# Altium PCB Powerdist.PcbDoc
Units mm, origin at the board's own origin, x right, y up, seen from the top; angles counter-clockwise.
Board outline 152.4 x 101.6 mm, 2 copper layers (Top Layer, Bottom Layer); 37 components, 20 nets, 100 pads, 0 vias.
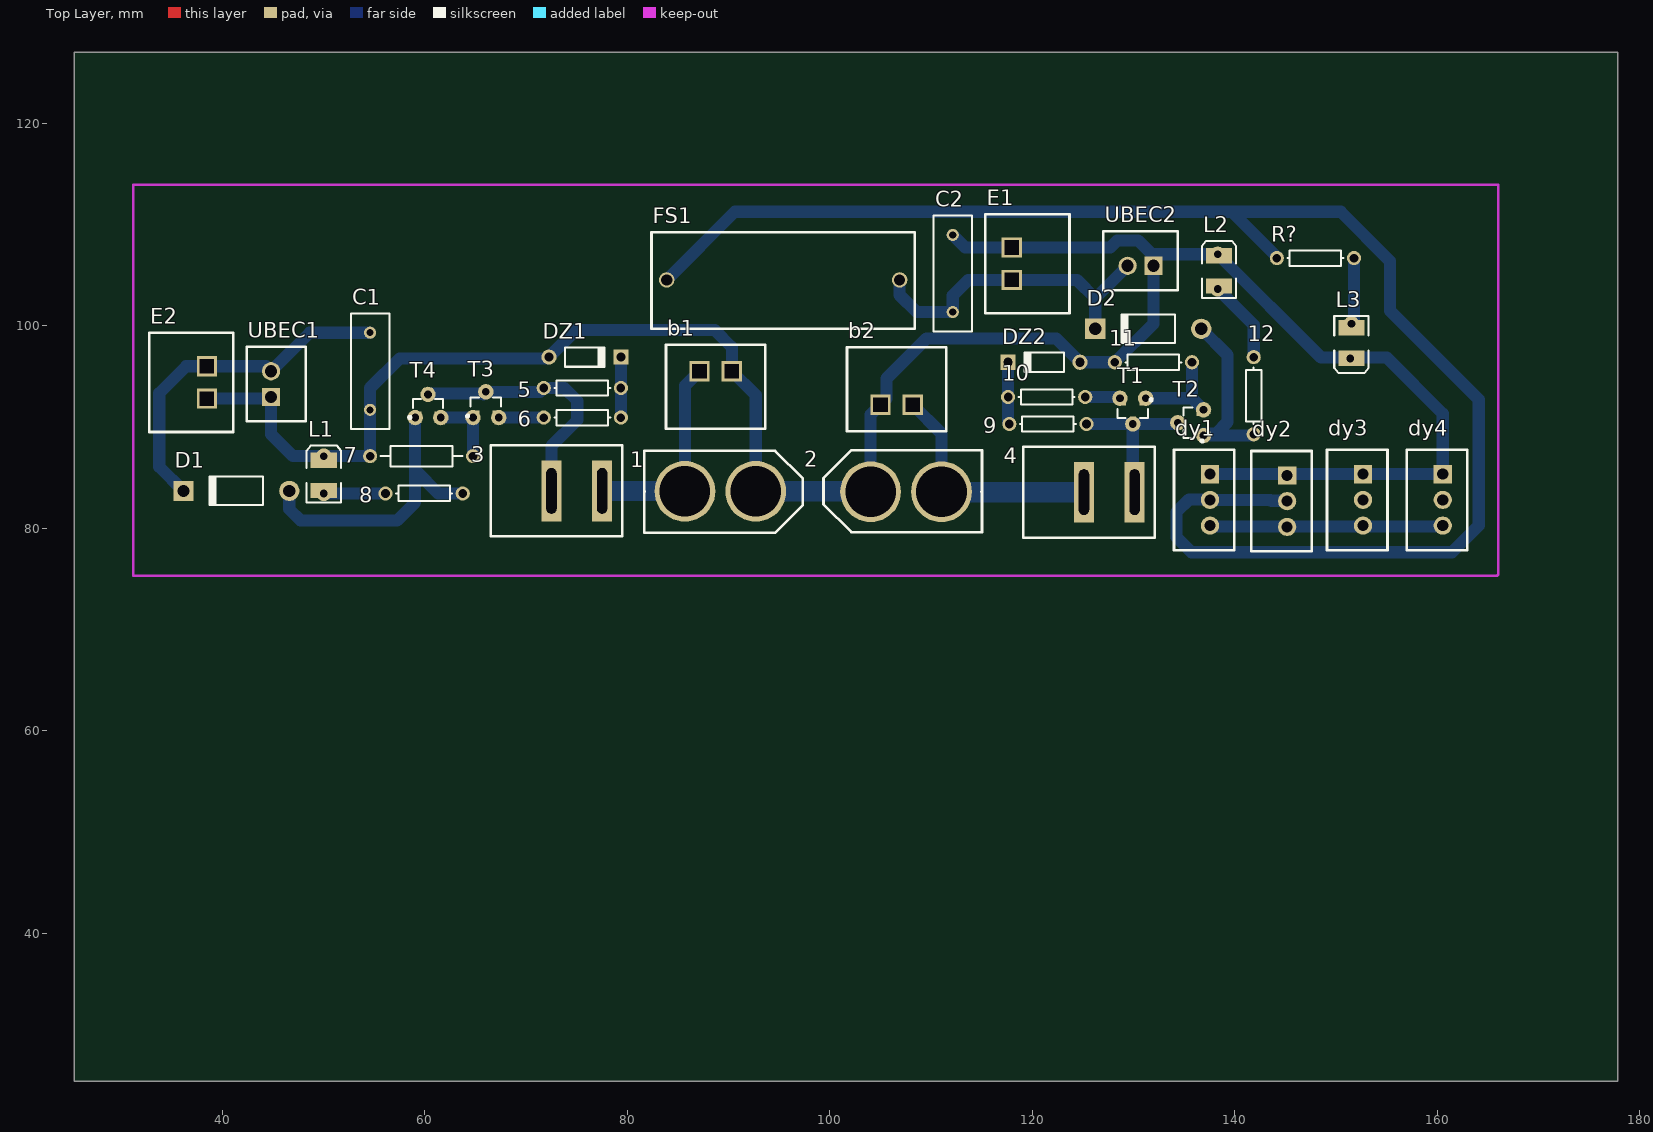
[diagram p0: Top Layer view]
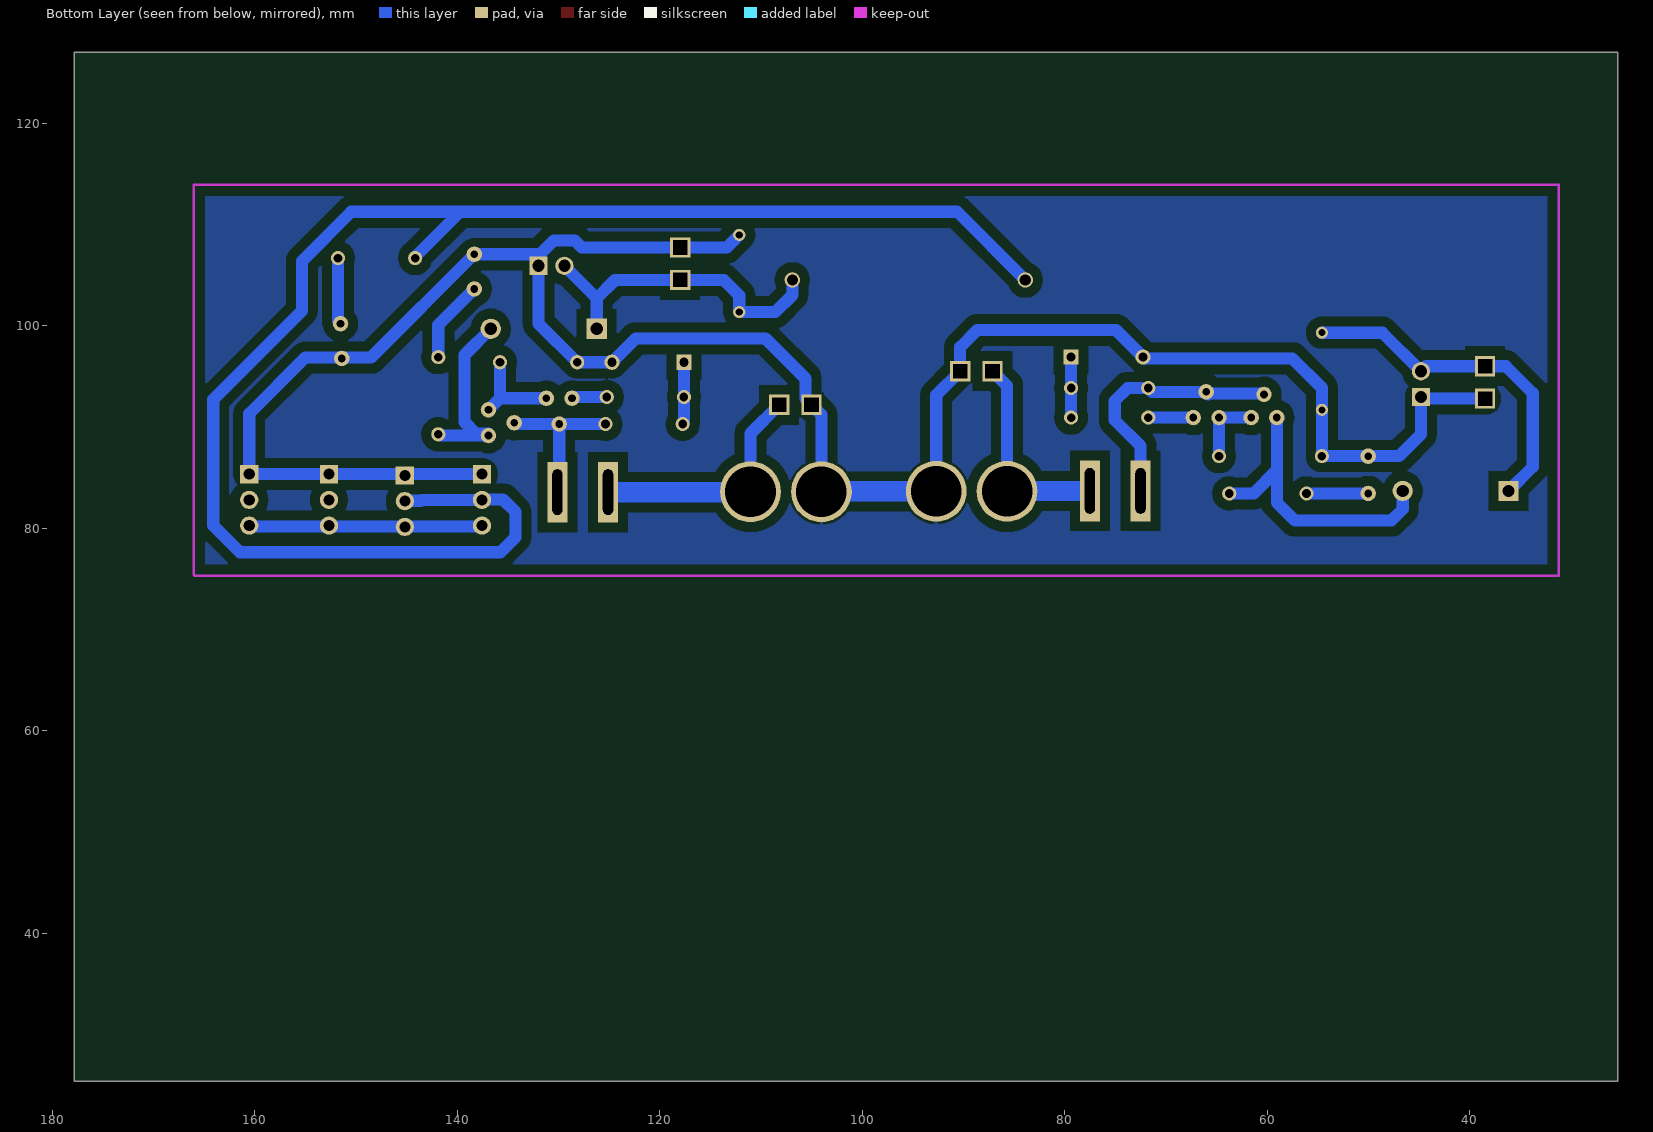
[diagram p1: Bottom Layer view, seen from below]

## Layer stack, top to bottom
Top Solder: solder mask 0.0102, Solder Resist, Dk 3.5
Top Layer: signal copper 0.0356
Dielectric 1: dielectric 0.32, FR-4, Dk 4.8
Bottom Layer: signal copper 0.0356
Bottom Solder: solder mask 0.0102, Solder Resist, Dk 3.5

## Board outline
25.4,25.4 177.8,25.4 177.8,127 25.4,127

## Design rules (kind name [scope] priority, off if disabled: settings)
Clearance [All] p1: gap=1
PolygonConnect [All] p1: connectstyle=Relief reliefconductorwidth=0.254 reliefentries=4 polygonreliefangle="90 Angle" airgapwidth=0.254
RoutingVias [All] p1: holewidth=0.711 width=1.27 viastyle="Through Hole" minholewidth=0.711 minwidth=1.27 maxholewidth=0.711 maxwidth=1.27
SolderMaskExpansion [All] p1: expansion=0.102
UnpouredPolygon [All] p1: allowunpoured=FALSE
Width [All] p1: maxlimit=1.2 minlimit=1.2 preferedwidth=1.2
29 further rules are at their usual default settings.

## Components (designator, comment, footprint, x,y, rotation, side; value= is the part's Value field where it differs from the comment)
1 "XT60" PCBComponent_1#1 83.693,80.645 r0 top
2 "XT60" PCBComponent_1#1 113.03,86.614 r180 top
3 "Swtch" PCBComponent_1#2 72.517,83.693 r0 top
4 "Swtch" PCBComponent_1#2 125.095,83.566 r0 top
5 "Res1" AXIAL-0.3 75.565,93.853 r0 top
6 "Res1" AXIAL-0.3 75.565,90.932 r180 top
7 "Res2" AXIAL-0.4 59.69,87.122 r180 top
8 "Res1" AXIAL-0.3 59.944,83.439 r180 top
9 "Res1" AXIAL-0.3 121.539,90.297 r180 top
10 "Res1" AXIAL-0.3 121.412,92.964 r0 top
11 "Res1" AXIAL-0.3 131.953,96.393 r180 top
12 "Res1" AXIAL-0.3 141.859,93.091 r90 top
b1 "buzzled1" PCBComponent_1#3 84.328,97.917 r0 top
b2 "buzzled2" PCBComponent_1#3 110.998,89.789 r180 top
C1 "Cap" RAD-0.3 54.61,95.504 r90 top
C2 "Cap" RAD-0.3 112.141,105.156 r270 top
D1 "Diode 1N4007" DO-41 41.402,83.693 r180 top
D2 "Diode 1N4007" DO-41 131.445,99.695 r180 top
dy1 "dynamixel" PCBComponent_1#4 137.541,85.344 r90 top
dy2 "dynamixel" PCBComponent_1#4 145.161,85.217 r90 top
dy3 "dynamixel" PCBComponent_1#4 152.654,85.344 r90 top
dy4 "dynamixel" PCBComponent_1#4 160.528,85.344 r90 top
DZ1 "Diode 1N4148" DO-35 75.819,96.901 r0 top
DZ2 "Diode 1N4148" DO-35 121.158,96.393 r180 top
E1 "EXP485" PCBComponent_1#3 115.57,101.727 r90 top
E2 "EXP485" PCBComponent_1#3 40.894,98.806 r270 top
FS1 "FUSE" PCBComponent_1#5 104.394,104.521 r180 top
L1 "LED3" 3.5X2.8X1.9 50.038,85.217 r90 top
L2 "LED3" 3.5X2.8X1.9 138.43,105.41 r90 top
L3 "LED3" 3.5X2.8X1.9 151.511,98.298 r270 top
R? "Res1" AXIAL-0.3 147.955,106.68 r180 top
T1 "BC557" SOT-23B_N 129.921,91.567 r270 top
T2 "BC557" SOT-23B_N 135.636,90.424 r180 top
T3 "BC557" SOT-23B_N 66.04,92.202 r90 top
T4 "BC557" SOT-23B_N 60.325,92.075 r90 top
UBEC1 "UBC1" PCBComponent_1#6 44.831,92.964 r270 top
UBEC2 "UBC2" PCBComponent_1#6 131.953,105.918 r0 top

## Footprints (in the part's own frame and the unit in brackets; to place one, negate y for a bottom-side part, rotate by r counter-clockwise, add the part's x,y. Pads: shape width x height; smd on the part's side, far side on the other; paste and mask are expansions set on the pad)
3.5X2.8X1.9 [mm] "SM LED; 2 C-Bend Leads; Body 3.5 x 2.8 x 1.9 mm, inc leads (LxWxH typ)"
  rect 1.5x2.6 smd: 1(-1.5,0) 2(1.5,0)
  silkscreen extent -2.65,-1.7 2.95,1.7
AXIAL-0.3 [mm] "Axial Device, Thru-Hole; 2 Leads; 0.3 in Pin Spacing"
  round 1.4 hole 0.85: 1(-3.81,0) 2(3.81,0)
  silkscreen extent -2.77,-0.76 2.77,0.76
AXIAL-0.4 [mm] "Axial Device, Thru-Hole; 2 Leads; 0.4 in Pin Spacing"
  round 1.4 hole 0.85: 1(-5.08,0) 2(5.08,0)
  silkscreen extent -4.06,-1.02 4.06,1.02
DO-35 [mm] "Diode, Axial; Body 3.8 x 1.9 mm (LxDia. max), Lead Dia. 0.53 mm (max)"
  round 1.5 hole 0.9: 1(-3.55,0)
  rect 1.5x1.5 hole 0.9: 2(3.55,0)
  silkscreen extent -1.95,-0.95 2.05,0.95
DO-41 [mm] "Diode, Axial; Body 5.2 x 2.7 mm (LxDia. max), Lead Dia. 0.86 mm (max)"
  round 2 hole 1.2: 1(-5.23,0)
  rect 2x2 hole 1.2: 2(5.23,0)
  silkscreen extent -2.65,-1.4 2.75,1.4
PCBComponent_1#1 [mm]
  round 6 hole 5: 1(2,3) 2(9,3)
  silkscreen extent -2,-1.1 13.65,7
PCBComponent_1#2 [mm]
  rect 2x6 hole 1 slot 4.5 at 90 deg: 1(0,0) 2(5,0)
  silkscreen extent -6,-4.5 7,4.5
PCBComponent_1#3 [mm]
  rect 2x2 hole 1.4 square: 1(2.8,-2.4) 2(6,-2.4)
  silkscreen extent -0.5,-8.1 9.3,0.2
PCBComponent_1#4 [mm]
  rect 1.8x1.8 hole 1.1: 1(0,0)
  round 1.8 hole 1.1: 2(-2.54,0) 3(-5.08,0)
  silkscreen extent -7.49,-2.41 2.41,3.56
PCBComponent_1#5 [mm]
  round 1.524 hole 1.1: 1(-2.5,0) 2(20.5,0)
  silkscreen extent -4,-4.7 22,4.8
PCBComponent_1#6 [mm]
  rect 1.8x1.8 hole 1.2: 1(0,0)
  round 1.8 hole 1.2: 2(-2.54,0)
  silkscreen extent -4.95,-2.41 2.41,3.43
RAD-0.3 [mm] "Radial Cap, Thru-Hole; 2 Leads; 0.3 in Pin Spacing"
  round 1.2 hole 0.7: 1(-3.81,0) 2(3.81,0)
  silkscreen extent -5.71,-1.91 5.71,1.91
SOT-23B_N [mm] "SOT23, 3-Leads, Body 2.9x1.3mm, Pitch 0.95mm, Lead Span 2.4mm, IPC Medium Density"
  rect 1.15x0.6 smd: 1(-1.125,0.95) 2(-1.125,-0.95) 3(1.125,0)
  silkscreen extent -1.25,-1.5 0.7,1.93, body extent -0.7,-1.5 0.7,1.5, height 1.14

## Part data
1 2: library part Component_2
3 4 b1 b2 dy1 dy2 dy3 dy4 E1 E2 FS1 UBEC1 UBEC2: library part Component_1
5 6 7 8 9 10 11 12 R?: "Resistor"
C1 C2: "Capacitor"
D1 D2: "1 Amp General Purpose Rectifier"
DZ1 DZ2: "High Conductance Fast Diode"
L1 L2 L3: "Typical BLUE SiC LED"
T1 T2 T3 T4: library part PNP, "PNP Bipolar Transistor"

## Free pads (board coordinates)
  round 1.524 hole 0.762: 0(67.31,90.932) 1(66.04,93.472) 2(64.77,90.932) 3(61.595,90.932) 4(59.055,90.932) 5(60.325,93.218) 6(50.038,83.439) 7(50.038,87.122) 8(128.651,92.837) 9(131.191,92.837) 10(129.921,90.297) 11(134.366,90.424) 12(136.906,91.694) 13(136.906,89.154) 14(138.303,103.632) 15(138.303,107.061) 16(151.511,100.203) 17(151.384,96.774)

## Nets (pads, with @x,y where several pads share a name; then routed paths per layer and width w, separated by ;. In a path a pad name is that pad's centre, name@x,y a point inside that pad or via, vN(x,y) a via of type N, cw(c..) or ccw(c..) an arc to the next point about the centre after c; other vN are vias at no path point)
Net1_1: 1.1 3.2 b1.1 | length 20.6
  Bottom Layer w1.2: 1.1 85.693,94.082 b1.1
  Bottom Layer w2: 3.2 1.1@85.645,83.693
Net1_2: 1.2 2.2 7.2 11.2 b1.2 b2.2 C1.1 C2.1 dy1.1 dy2.1 dy3.1 dy4.1 DZ1.1 DZ2.1 E1.2 E2.2 L1.2 L2.2 L3.2 pad.7 pad.15 pad.17 UBEC1.1 UBEC2.1 | length 227
  Bottom Layer w1.2: E2.2 UBEC1.1@44.673,92.806 ; UBEC1.1 44.831,89.281 46.99,87.122 pad.7 7.2 C1.1 54.61,93.853 57.531,96.774 DZ1.1@72.142,96.774 ; DZ1.1 74.936,99.568 88.646,99.568 90.328,97.886 b1.2 92.693,93.152 1.2 ; 2.2 104.03,83.676 104.03,91.221 b2.2 105.598,92.789 105.598,94.789 109.552,98.743 122.358,98.743 DZ2.1 11.2 131.953,100.203 UBEC2.1 131.913,105.958 131.913,106.954 130.449,108.418 128.377,108.418 127.686,107.727 E1.2 113.38,107.727 C2.1 ; 132.02,107.061 pad.15 148.512,96.852 154.989,96.852 160.528,91.313 dy4.1 dy3.1 dy1.1
  Bottom Layer w2: 1.2 1.2@92.947,83.645 ; 1.2@92.82,83.772 1.2@92.947,83.645 ; 1.2@92.978,83.614 1.2@92.947,83.645 ; 2.2@104.03,83.676 103.999,83.645 1.2@92.947,83.645
Net2_1: 2.1 4.1 b2.1 | length 23.1
  Bottom Layer w1.2: b2.1 111.03,89.357 2.1
  Bottom Layer w2: 2.1 111.078,83.566 4.1@124.333,83.566
Net3_1: 3.1 5.1 pad.1 pad.5 T3.3 T4.3 | length 25.6
  Bottom Layer w1.2: pad.5 60.325,93.294 65.748,93.294 65.805,93.237 pad.1 71.374,93.472 5.1 73.787,93.853 75.057,92.583 75.057,90.678 72.517,88.138 3.1
Net4_2: 4.2 9.1 pad.10 pad.11 T1.3 T2.3 | length 15.4
  Bottom Layer w1.2: 9.1 pad.10 ; 4.2@129.921,83.74 pad.10 ; pad.11@134.239,90.297 pad.10
Net5_2: 5.2 6.1 DZ1.2 | length 6
  Bottom Layer w1.2: 6.1@79.369,90.938 DZ1.2
Net6_2: 6.2 pad.0 T3.2 | length 4.4
  Bottom Layer w1.2: pad.0 6.2
Net7_1: 7.1 pad.2 pad.3 T3.1 T4.2 | length 7
  Bottom Layer w1.2: pad.3 pad.2 7.1
Net8_1: 8.1 D1.1 pad.4 T4.1 | length 29.3
  Bottom Layer w1.2: D1.1 46.632,81.892 47.752,80.772 57.277,80.772 59.055,82.55 pad.4 ; 59.182,85.598 61.341,83.439 8.1
Net8_2: 8.2 L1.1 pad.6 | length 5.8
  Bottom Layer w1.2: pad.6 8.2@55.88,83.439
Net9_2: 9.2 10.1 DZ2.2 | length 6
  Bottom Layer w1.2: 9.2@117.608,90.418 DZ2.2
Net10_2: 10.2 pad.8 T1.2 | length 3.3
  Bottom Layer w1.2: 10.2 pad.8@128.524,92.964
Net11_1: 11.1 pad.9 pad.12 T1.1 T2.2 | length 9.7
  Bottom Layer w1.2: pad.9 135.763,92.837 ; 11.1 135.763,92.837 ; pad.12 135.763,92.837
Net12_1: 12.1 D2.1 pad.13 T2.1 | length 17.8
  Bottom Layer w1.2: D2.1 139.268,97.102 139.268,90.5 138.1,89.332 pad.13@136.906,89.332 ; pad.13 12.1@141.605,89.154
Net12_2: 12.2 L2.1 pad.14 | length 8.2
  Bottom Layer w1.2: pad.14 141.859,100.076 12.2
NetC1_2: C1.2 D1.2 E2.1 UBEC1.2 | length 33.6
  Bottom Layer w1.2: D1.2 33.782,86.083 33.782,93.345 36.443,96.006 E2.1 UBEC1.2@44.329,96.006 ; UBEC1.2 48.641,99.314 C1.2
NetC2_2: C2.2 D2.2 E1.1 FS1.1 UBEC2.2 | length 32.1
  Bottom Layer w1.2: FS1.1 106.894,103.037 108.585,101.346 C2.2 112.141,102.997 113.671,104.527 E1.1 124.408,104.527 126.215,102.72 ; D2.2 126.215,102.72 ; UBEC2.2 126.215,102.72
Netdy1_2: dy1.2 dy2.2 FS1.2 R?.2 | length 157.9
  Bottom Layer w1.2: FS1.2 90.625,111.252 139.7,111.252 ; dy1.2 143.511,82.804 143.598,82.717 dy2.2@145.121,82.717 ; dy1.2@137.581,82.844 135.46,82.844 134.239,81.623 134.239,79.121 135.723,77.637 161.437,77.637 164.084,80.284 164.084,92.71 155.321,101.473 155.321,106.377 150.446,111.252 139.7,111.252 ; R?.2 144.145,106.807 139.7,111.252
Netdy1_3: dy1.3 dy2.3 dy3.3 dy4.3 | length 23
  Bottom Layer w1.2: dy1.3 137.541,80.177 dy4.3@160.441,80.177
NetL3_1: L3.1 pad.16 R?.1 | length 6.2
  Bottom Layer w1.2: pad.16@151.765,100.457 R?.1
pads on no net: dy3.2 dy4.2

## Polygon pours and split planes (outlines as drawn)
Net1_2 on Bottom Layer "Bottom Layer-No Net" (solid, pour order 3): 31.496,113.919 31.242,113.665 31.242,75.311 165.862,75.311 165.989,75.438 165.989,113.919

## Keep-outs
Keep-Out Layer:
  lines w0.254: 31.242,75.311 165.862,75.311 165.989,75.438 165.989,113.919 31.242,113.919 31.242,75.311

## Dimensions
167.64,75.248 to 166.878,113.919 on Mechanical 1
31.18,74.041 to 166.181,73.787 on Mechanical 1